# EAGLE board science_controller (EAGLE 9.3.0)
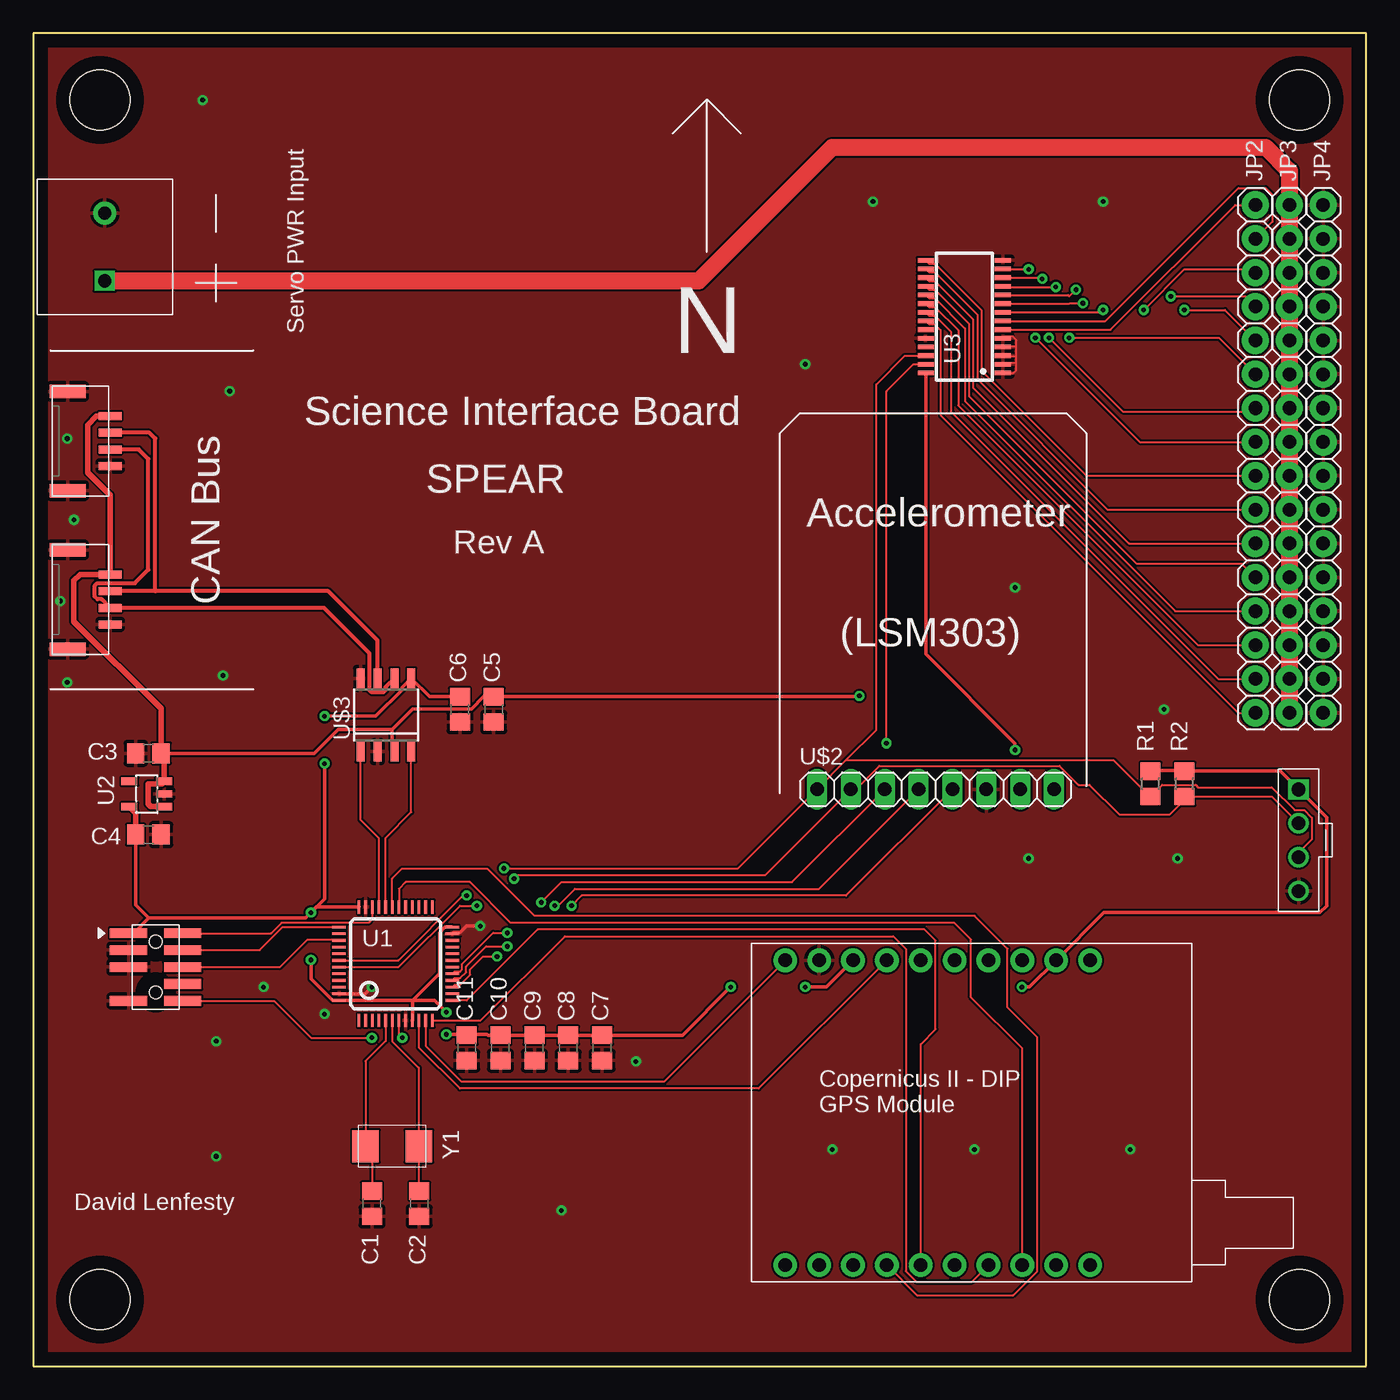
[diagram p0: board, top side]
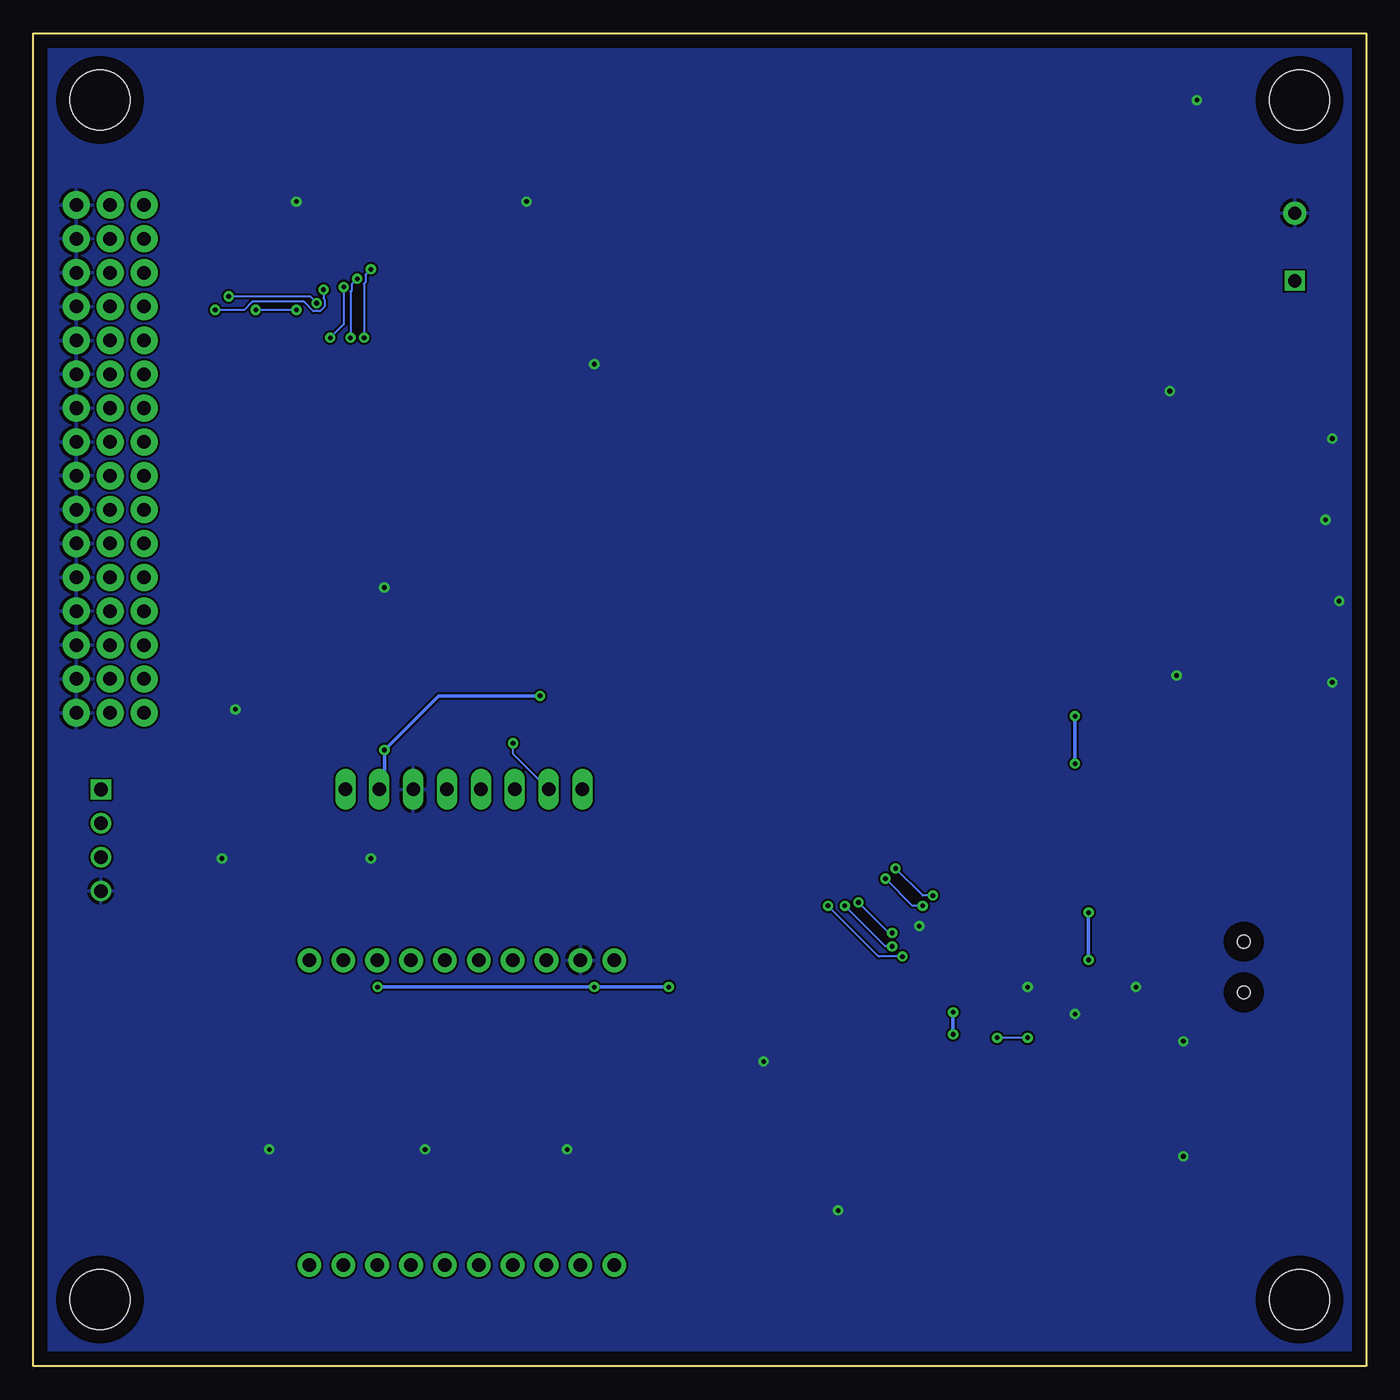
[diagram p1: board, bottom side, seen from below]

Size 100 x 100 mm. Coordinates in mm from the lower left corner, seen from the top.
Outline: 0,0 100,0 100,100 0,100 0,0
Copper layers (1*16): Top 0.035mm / dielectric 1.5mm / Bottom 0.035mm
Design rules "default": minimum track width 6mil, minimum drill 0.35mm, track to track 6mil, track to pad 6mil, pad to pad 6mil, via to via 6mil, smd to smd 6mil, copper to edge 40mil, drill to drill 6mil, minimum pad ring 10mil, minimum via ring 8mil, stop-mask expansion 4mil, vias tented up to drill 0mil, thermal gap 10mil
Holes 4.5 mm at 5,5 95,5 95,95 5,95

## Footprints (pad centres in the part's own frame; a part is rotated, then mirrored left to right if it is on the bottom)
C0805 = smd 1.3 x 1.5: 1 -0.95,0; 2 0.95,0
SM04B-GHS-TB = smd 0.6 x 1.7: 1 -1.875,0.85; 2 -0.625,0.85; 3 0.625,0.85; 4 1.875,0.85 | smd 1 x 2.7: TAB_A -3.725,-2.35; TAB_B 3.725,-2.35
ED350/2 = drill 1 square: 1 -2.54,0 | drill 1 pad 1.7: 2 2.54,0
FTSH-105-01-F-DV-007 = smd 0.737 x 2.794: 1 -2.54,-2.032; 2 -2.54,2.032; 3 -1.27,-2.032; 4 -1.27,2.032; 5 0,-2.032; 6 0,2.032; 8 1.27,2.032; 9 2.54,-2.032; 10 2.54,2.032 | hole 0.965: -1.905,0; 1.905,0
1X16 = drill 1.016 pad 2.032: 1 -19.05,0; 2 -16.51,0; 3 -13.97,0; 4 -11.43,0; 5 -8.89,0; 6 -6.35,0; 7 -3.81,0; 8 -1.27,0; 9 1.27,0; 10 3.81,0; 11 6.35,0; 12 8.89,0; 13 11.43,0; 14 13.97,0; 15 16.51,0; 16 19.05,0
TE_5-103669-3 = drill 1.016 square: P$1 0,0 | drill 1.016: P$2 2.54,0; P$3 5.08,0; P$4 7.62,0
R0805 = smd 1.3 x 1.5: 1 -0.95,0; 2 0.95,0
LQFP48 = smd 0.2 x 1: 1 -2.75,-4.25; 2 -2.25,-4.25; 3 -1.75,-4.25; 4 -1.25,-4.25; 5 -0.75,-4.25; 6 -0.25,-4.25; 7 0.25,-4.25; 8 0.75,-4.25; 9 1.25,-4.25; 10 1.75,-4.25; 11 2.25,-4.25; 12 2.75,-4.25; 25 2.75,4.25; 26 2.25,4.25; 27 1.75,4.25; 28 1.25,4.25; 29 0.75,4.25; 30 0.25,4.25; 31 -0.25,4.25; 32 -0.75,4.25; 33 -1.25,4.25; 34 -1.75,4.25; 35 -2.25,4.25; 36 -2.75,4.25 | smd 1 x 0.2: 13 4.25,-2.75; 14 4.25,-2.25; 15 4.25,-1.75; 16 4.25,-1.25; 17 4.25,-0.75; 18 4.25,-0.25; 19 4.25,0.25; 20 4.25,0.75; 21 4.25,1.25; 22 4.25,1.75; 23 4.25,2.25; 24 4.25,2.75; 37 -4.25,2.75; 38 -4.25,2.25; 39 -4.25,1.75; 40 -4.25,1.25; 41 -4.25,0.75; 42 -4.25,0.25; 43 -4.25,-0.25; 44 -4.25,-0.75; 45 -4.25,-1.25; 46 -4.25,-1.75; 47 -4.25,-2.25; 48 -4.25,-2.75
SOT25 = smd 0.55 x 1.2: 1 -0.95,-1.3; 2 0,-1.3; 3 0.95,-1.3; 4 0.95,1.3; 5 -0.95,1.3
TSSOP28 = smd 0.35 x 1.2: 1 -4.225,-2.9; 2 -3.575,-2.9; 3 -2.925,-2.9; 4 -2.275,-2.9; 5 -1.625,-2.9; 6 -0.975,-2.9; 7 -0.325,-2.9; 8 0.325,-2.9; 9 0.975,-2.9; 10 1.625,-2.9; 11 2.275,-2.9; 12 2.925,-2.9; 13 3.575,-2.9; 14 4.225,-2.9; 15 4.225,2.9; 16 3.575,2.9; 17 2.925,2.9; 18 2.275,2.9; 19 1.625,2.9; 20 0.975,2.9; 21 0.325,2.9; 22 -0.325,2.9; 23 -0.975,2.9; 24 -1.625,2.9; 25 -2.275,2.9; 26 -2.925,2.9; 27 -3.575,2.9; 28 -4.225,2.9
COPERN2-DIP = drill 1.016 pad 1.778: 1 0,0; 2 2.54,0; 3 5.08,0; 4 7.62,0; 5 10.16,0; 6 12.7,0; 7 15.24,0; 8 17.78,0; 9 20.32,0; 10 22.86,0; 11 22.86,22.86; 12 20.32,22.86; 13 17.78,22.86; 14 15.24,22.86; 15 12.7,22.86; 16 10.16,22.86; 17 7.62,22.86; 18 5.08,22.86; 19 2.54,22.86; 20 0,22.86
1X08 = drill 1.016 long: 1 -8.89,0; 2 -6.35,0; 3 -3.81,0; 4 -1.27,0; 5 1.27,0; 6 3.81,0; 7 6.35,0; 8 8.89,0
SOIC8 = smd 0.6 x 1.5: 1 -1.905,-2.75; 2 -0.635,-2.75; 3 0.635,-2.75; 4 1.905,-2.75; 5 1.905,2.75; 6 0.635,2.75; 7 -0.635,2.75; 8 -1.905,2.75
NX5032 = smd 2 x 2.4: P$1 -2,0; P$2 2,0

## Placement (x,y rotation side)
C1  22pF  [C0805]  25.4,12.19 270 top
C2  22pF  [C0805]  28.96,12.19 270 top
C3  1uF  [C0805]  8.64,45.97 180 top
C4  1uF  [C0805]  8.64,39.88 0 top
C5  0u1F  [C0805]  34.54,49.28 270 top
C6  0u1F  [C0805]  32,49.28 270 top
C7  0u1F  [C0805]  42.67,23.88 270 top
C8  0u1F  [C0805]  40.13,23.88 270 top
C9  0u1F  [C0805]  37.59,23.88 270 top
C10  0u1F  [C0805]  35.05,23.88 270 top
C11  4u7F  [C0805]  32.51,23.88 270 top
CON1  UAVCAN_MICRO  [SM04B-GHS-TB]  4.92,57.52 270 top
CON2  UAVCAN_MICRO  [SM04B-GHS-TB]  4.92,69.41 270 top
J1  ED350/2  [ED350/2]  5.36,83.97 90 top
JP1  CORTEX-M-DBG  [FTSH-105-01-F-DV-007]  9.18,29.94 270 top
JP2  PINHD-16  [1X16]  91.69,68.07 270 top
JP3  PINHD-16  [1X16]  94.23,68.07 270 top
JP4  PINHD-16  [1X16]  96.77,68.07 270 top
P1  I2C-PWR  [TE_5-103669-3]  94.93,43.27 270 top
R1  4k7  [R0805]  83.82,43.69 90 top
R2  4k7  [R0805]  86.36,43.69 90 top
U1  STM32F303CB  [LQFP48]  27.19,30.2 0 top
U2  AP2112K-3.3TRG1  [SOT25]  8.51,42.93 90 top
U3  PCA9685PW  [TSSOP28]  69.85,78.74 90 top
U$1  COPERN2-DIP  [COPERN2-DIP]  56.42,7.59 0 top
U$2  LSM303-BRKOUT  [1X08]  67.69,43.28 0 top
U$3  MCP2562-E/SN  [SOIC8]  26.45,48.86 0 top
Y1  NX5032  [NX5032]  26.92,16.51 180 top

## Library data of the parts
C1-C11 R1 R2 = resistor
CON1 CON2 JP1 U1 U2 U$3 Y1 = SPEAR-general
J1 JP2-JP4 P1 U3 U$1 U$2 = SPEAR-science-controller

## Nets
+3V3: C4.1 C6.1 C7.1 C8.1 C9.1 C10.1 C11.1 JP1.1 P1.P$1 R1.2 R2.2 U1.9 U1.24 U1.36 U1.48 U2.5 U$1.12 U$1.18 U$3.5
+5V: C3.1 C5.1 CON1.1 CON2.1 U2.1 U2.3 U3.28 U$2.7 U$3.3
ACC_DRDY: U1.15 U$2.5
ACC_INT1: U1.16 U$2.4
ACC_INT2: U1.17 U$2.3
CAN_RXD: U1.32 U$3.4
CAN_TXD: U1.33 U$3.1
GND: C1.2 C2.2 C3.2 C4.2 C5.2 C6.2 C7.2 C8.2 C9.2 C10.2 C11.2 CON1.4 CON1.TAB_A CON1.TAB_B CON2.4 CON2.TAB_A CON2.TAB_B J1.2 JP1.3 JP1.5 JP1.9 JP4.1 JP4.2 JP4.3 JP4.4 JP4.5 JP4.6 JP4.7 JP4.8 JP4.9 JP4.10 JP4.11 JP4.12 JP4.13 JP4.14 JP4.15 JP4.16 P1.P$4 U1.8 U1.23 U1.35 U1.47 U2.2 U3.1 U3.2 U3.3 U3.4 U3.5 U3.14 U3.24 U$1.19 U$2.6 U$3.2 U$3.8
GPS_XRST: U1.10 U$1.17
GPS_XSTBY: U1.11 U$1.20
N$1: C1.1 U1.5 Y1.P$2
N$2: C2.1 U1.6 Y1.P$1
N$3: CON1.2 CON2.2 U$3.7
N$4: CON1.3 CON2.3 U$3.6
NRST: JP1.10 U1.7
SCL: P1.P$3 R1.1 U1.42 U3.26 U$2.1
SDA: P1.P$2 R2.1 U1.43 U3.27 U$2.2
SERVO0: JP2.1 U3.6
SERVO1: JP2.2 U3.7
SERVO2: JP2.3 U3.8
SERVO3: JP2.4 U3.9
SERVO4: JP2.5 U3.10
SERVO5: JP2.6 U3.11
SERVO6: JP2.7 U3.12
SERVO7: JP2.8 U3.13
SERVO8: JP2.9 U3.15
SERVO9: JP2.10 U3.16
SERVO10: JP2.11 U3.17
SERVO11: JP2.12 U3.18
SERVO12: JP2.13 U3.19
SERVO13: JP2.14 U3.20
SERVO14: JP2.15 U3.21
SERVO15: JP2.16 U3.22
SERVO_!OE: U3.23
SWCLK: JP1.4 U1.37
SWDIO: JP1.2 U1.34
SWO: JP1.6 U1.39
USART1_RX: U1.31 U$1.4
USART1_TX: U1.30 U$1.8
USART2_RX: U1.13 U$1.5
USART2_TX: U1.12 U$1.7
VCC: J1.1 JP3.1 JP3.2 JP3.3 JP3.4 JP3.5 JP3.6 JP3.7 JP3.8 JP3.9 JP3.10 JP3.11 JP3.12 JP3.13 JP3.14 JP3.15 JP3.16

## Tracks (layer width: path | path; a pad name or v marks a point on that pad's centre or on a via)
+3V3  (via drill 0.35)
  Top 0.254: 32.58,24.89 34.04,24.89 34.1,24.83 C10.1 C9.1 C8.1 C7.1 48.7,24.83 v52.32,28.45 | 32.58,24.89 C11.1 | v57.91,28.45 59.5,28.45 U$1.18 | v74.17,28.45 74.74,28.45 U$1.12 80.33,34.04 96.52,34.04 97.03,34.54 97.03,41.17 P1.P$1 93.56,44.64 R2.2 86.29,44.7 83.75,44.7 R1.2 | 28.45,27.43 22.95,27.43 U1.48 22.44,27.45 20.83,29.06 v20.83,30.48 | 28.45,27.43 U1.9 | 28.45,27.43 30.11,27.43 v30.99,26.55 | v30.99,24.89 32.58,24.89 | 28.45,27.43 30.48,29.46 30.48,32.52 30.91,32.95 U1.24 | v20.83,34.04 21.24,34.45 U1.36 | v20.83,34.04 20.42,33.63 8.66,33.63 | JP1.1 7.51,32.48 8.66,33.63 | 8.66,33.63 7.69,34.6 C4.1 | C6.1 29.74,50.23 U$3.5 27.67,50.92 27.67,50.74 25.69,48.77 v21.84,48.77 | v21.84,45.21 21.84,35.05 v20.83,34.04
  Top 0.406: U2.5 7.69,41.5 C4.1
  Bottom 0.254: v52.32,28.45 v57.91,28.45 v74.17,28.45 | v30.99,26.55 v30.99,24.89 | v20.83,30.48 v20.83,34.04 | v21.84,48.77 v21.84,45.21
+5V  (via drill 0.35)
  Top 0.254: C3.1 21.08,45.97 22.86,47.75 26.92,47.75 | 26.92,47.75 26.92,46.27 U$3.3 | 26.92,47.75 28.47,49.3 32.87,49.3 33.8,50.23 C5.1 61.91,50.23 v61.98,50.29 | U3.28 66.95,53.45 73.66,46.74 v73.66,46.23
  Top 0.406: CON2.1 4.74,71.28 4.06,70.61 4.06,67.06 5.77,65.35 CON1.1 3.52,59.4 3.05,58.93 3.05,55.88 9.59,49.34 C3.1 9.81,45.75 U2.3 9.62,43.69 8.64,43.69 8.64,42.16 8.82,41.98 U2.1
  Bottom 0.254: U$2.7 73.66,43.66 v73.66,46.23 69.6,50.29 v61.98,50.29
ACC_DRDY  (via drill 0.35)
  Top 0.152: v34.8,30.73 33.73,30.73 32.77,29.78 32.77,29.36 32.03,28.62 31.61,28.62 U1.15 | v40.39,34.54 41.15,35.31 60.99,35.31 U$2.5
  Bottom 0.152: v34.8,30.73 36.58,30.73 v40.39,34.54
ACC_INT1  (via drill 0.35)
  Top 0.152: v35.56,31.5 33.99,31.5 32.47,29.98 32.47,29.55 32.03,29.12 31.61,29.12 U1.16 | v39.12,34.54 39.37,34.54 40.64,35.81 58.95,35.81 U$2.4
  Bottom 0.152: v35.56,31.5 36.07,31.5 v39.12,34.54
ACC_INT2  (via drill 0.35)
  Top 0.152: v35.56,32.51 34.5,32.51 32.16,30.17 32.16,29.75 32.03,29.62 31.61,29.62 U1.17 | v38.1,34.8 39.62,36.32 56.92,36.32 U$2.3
  Bottom 0.152: v35.56,32.51 35.81,32.51 v38.1,34.8
CAN_RXD
  Top 0.152: U1.32 26.44,39.64 28.36,41.57 U$3.4
CAN_TXD
  Top 0.152: U1.33 25.94,39.6 24.55,40.98 U$3.1
GND  (via drill 0.35)
  Top 0.152: U3.1 73.52,74.52 73.75,74.75 73.75,75.25 | 73.75,75.25 73.75,75.75 | 73.75,75.75 73.75,76.5 | 73.75,76.5 73.75,77 73.5,77.25 72.89,77.25 U3.5 | 73.75,76.5 72.78,76.5 U3.4 | 73.75,75.75 72.81,75.75 U3.3 | 73.75,75.25 72.83,75.25 U3.2
  Top 0.254: U1.23 31.53,32.54 32.02,32.54 32.51,33.02 v33.53,33.02 | U1.47 24.9,27.95 v25.4,28.45
  other vias: 2.54,69.6 3.05,63.5 14.73,73.15 12.7,95 57.91,75.18 62.99,87.38 80.26,87.38 73.66,58.42 84.84,49.28 85.85,38.1 74.68,38.1 82.3,16.26 70.61,16.26 59.94,16.26 39.62,11.68 13.72,15.75 13.72,24.38 17.27,28.45 21.84,26.42 45.21,22.86 14.22,51.82 2.54,51.31 2.03,57.4
  pour Top: 0,100 0,0 100,0 100,100
  pour Bottom: 0,100 0,0 100,0 100,100
GPS_XRST
  Top 0.152: U$1.17 54.42,20.83 32,20.83 28.94,23.9 U1.10
GPS_XSTBY
  Top 0.152: U1.11 29.46,25.92 29.46,24 32.12,21.34 47.31,21.34 U$1.20
N$1
  Top 0.152: U1.5 26.44,24.4 24.92,22.89 Y1.P$2 25.4,16.03 C1.1
N$2
  Top 0.152: U1.6 26.92,25.93 26.92,24.38 28.92,22.38 Y1.P$1 28.92,13.17 C2.1
N$3
  Top 0.305: U$3.7 25.82,54.45 22.12,58.15 9.14,58.15 | 9.14,58.15 CON1.2 | 9.14,58.15 9.14,69.6 8.71,70.03 CON2.2
N$4
  Top 0.305: U$3.6 26.42,50.94 26.42,50.73 26.24,50.55 25.39,50.55 25.21,50.73 25.21,53.48 21.8,56.9 CON1.3 5.12,57.54 4.79,57.54 4.62,57.72 4.62,58.57 4.79,58.75 7.62,58.75 8.64,59.77 8.64,68.07 7.92,68.78 CON2.3
NRST  (via drill 0.35)
  Top 0.152: JP1.10 18.06,27.4 20.83,24.64 v25.4,24.64 | v27.69,24.64 27.44,24.89 U1.7
  Bottom 0.152: v25.4,24.64 v27.69,24.64
SCL  (via drill 0.35)
  Top 0.152: U1.42 27.4,30.45 32.26,35.31 v32.51,35.31 | v35.31,37.34 52.86,37.34 U$2.1 60.99,45.47 | 60.99,45.47 81.03,45.47 83.75,42.74 R1.1 84.7,43.62 87.2,43.62 87.39,43.43 92.92,43.43 94.63,41.72 95.34,41.72 95.92,41.14 95.92,39.53 94.93,38.54 P1.P$3 | 60.99,45.47 63.25,47.73 63.25,73.66 65.4,75.81 U3.26
  Bottom 0.152: v32.51,35.31 33.27,35.31 v35.31,37.34
SDA  (via drill 0.35)
  Top 0.152: U1.43 27.41,29.95 32,34.54 v33.27,34.54 | v36.07,36.58 36.32,36.83 54.89,36.83 U$2.2 61.72,43.28 63.47,45.03 76.99,45.03 78.41,43.62 79.25,43.62 81.46,41.4 85.28,41.4 86.61,42.74 | R2.1 86.61,42.74 | 86.61,42.74 92.92,42.74 P1.P$2 | v64.01,46.74 64.01,73.15 66.02,75.17 U3.27
  Bottom 0.152: v33.27,34.54 34.04,34.54 v36.07,36.58 | U$2.2 64.01,45.95 v64.01,46.74
SERVO0
  Top 0.152: U3.6 80.81,77.77 90.17,87.12 JP2.1
SERVO1
  Top 0.152: U3.7 80.45,78.42 90.42,88.39 92.46,88.39 92.96,87.88 92.96,85.85 JP2.2
SERVO2  (via drill 0.35)
  Top 0.152: U3.8 80.08,79.06 v80.26,79.25 | v83.31,79.25 86.36,82.3 91.44,82.3 JP2.3
  Bottom 0.152: v80.26,79.25 v83.31,79.25
SERVO3  (via drill 0.35)
  Top 0.152: U3.9 77.72,79.72 77.77,79.76 v78.74,79.76 | v85.34,80.26 90.93,80.26 JP2.4
  Bottom 0.152: v85.34,80.26 79.25,80.26 v78.74,79.76
SERVO4  (via drill 0.35)
  Top 0.152: U3.10 77.62,80.36 77.72,80.26 v78.23,80.77 | v86.36,79.25 89.41,79.25 JP2.5
  Bottom 0.152: v86.36,79.25 84.17,79.25 83.56,79.86 79.7,79.86 78.99,79.15 78.49,79.15 78.13,79.5 78.13,80.01 78.23,80.11 v78.23,80.77
SERVO5  (via drill 0.35)
  Top 0.152: U3.11 arc90 72.79,80.97 v76.71,80.97 | v77.72,77.16 88.96,77.16 JP2.6
  Bottom 0.152: v76.71,80.97 76.71,78.17 v77.72,77.16
SERVO6  (via drill 0.35)
  Top 0.152: U3.12 75.61,81.67 v75.69,81.58 | v76.2,77.16 81.73,71.63 91.44,71.63 JP2.7
  Bottom 0.152: v75.69,81.58 76.1,81.17 76.1,80.72 76.2,80.62 v76.2,77.16
SERVO7  (via drill 0.35)
  Top 0.152: U3.13 72.77,82.3 v74.68,82.3 | v75.18,77.16 83,69.34 JP2.8
  Bottom 0.152: v75.18,77.16 75.18,81.23 75.08,81.33 75.08,81.89 v74.68,82.3
SERVO8
  Top 0.152: U3.15 67.2,82.72 67.64,82.72 71.12,79.24 71.12,74.68 78.99,66.8 JP2.9
SERVO9
  Top 0.152: U3.16 67.2,82.07 67.64,82.07 70.81,78.9 70.81,74.04 80.59,64.26 JP2.10
SERVO10
  Top 0.152: U3.17 67.2,81.42 67.64,81.42 70.51,78.55 70.51,73.41 82.2,61.72 JP2.11
SERVO11
  Top 0.152: U3.18 67.2,80.77 67.64,80.77 70.21,78.21 70.21,72.77 82.78,60.2 90.68,60.2 JP2.12
SERVO12
  Top 0.152: U3.19 67.2,80.12 67.64,80.12 69.9,77.86 69.9,72.42 85.67,56.64 JP2.13
SERVO13
  Top 0.152: U3.20 67.2,79.47 67.64,79.47 69.39,77.72 69.39,72.08 87.38,54.1 JP2.14
SERVO14
  Top 0.152: U3.21 67.2,78.82 67.64,78.82 68.83,77.63 68.83,71.63 88.9,51.56 JP2.15
SERVO15
  Top 0.152: U3.22 67.2,78.17 67.64,78.17 68.07,77.74 68.07,71.37 90.42,49.02 JP2.16
SWCLK
  Top 0.152: JP1.4 16.99,31.21 18.72,32.95 U1.37
SWDIO
  Top 0.152: JP1.2 17.83,32.48 18.62,33.27 25.15,33.27 25.44,33.56 U1.34
SWO
  Top 0.152: JP1.6 18.51,29.94 20.57,32 22.88,32 U1.39
USART1_RX
  Top 0.152: U$1.4 66.3,5.33 73.53,5.33 75.32,7.13 75.32,24.68 73.08,26.92 73.08,31.31 70.61,33.78 37.59,33.78 34.04,37.34 27.69,37.34 26.94,36.59 U1.31
USART1_TX
  Top 0.152: U$1.8 74.2,23.84 70.36,27.69 70.36,32 69.09,33.27 35.81,33.27 32.77,36.32 27.94,36.32 27.43,35.81 27.44,35.81 U1.30
USART2_RX
  Top 0.152: U$1.5 66.58,24.16 67.7,25.28 67.7,31.93 66.86,32.77 37.85,32.77 32.51,27.43 31.45,27.43 U1.13
USART2_TX
  Top 0.152: U$1.7 70.42,6.35 66.24,6.35 65.46,7.13 65.46,31.31 64.52,32.26 39.88,32.26 33.56,25.95 U1.12
VCC
  Top 1.27: J1.1 49.93,81.43 59.94,91.44 92.46,91.44 94.23,89.66 JP3.1 JP3.2 JP3.3 JP3.4 JP3.5 JP3.6 JP3.7 JP3.8 JP3.9 JP3.10 JP3.11 JP3.12 JP3.13 JP3.14 JP3.15 JP3.16

## Text on the board
tPlace: Servo PWR Input | N | Science Interface Board | SPEAR | Accelerometer | Rev A | CAN Bus | (LSM303) | David Lenfesty